# Altium PCB PCB3 - 5x5 - placement V1.PcbDoc
Units mm, origin at the board's own origin, x right, y up, seen from the top; angles counter-clockwise.
Board outline 50 x 50 mm, 2 copper layers (Top Layer, Bottom Layer); 85 components, 65 nets, 284 pads, 41 vias.
Unrouted connection lines stored in the file: 2.
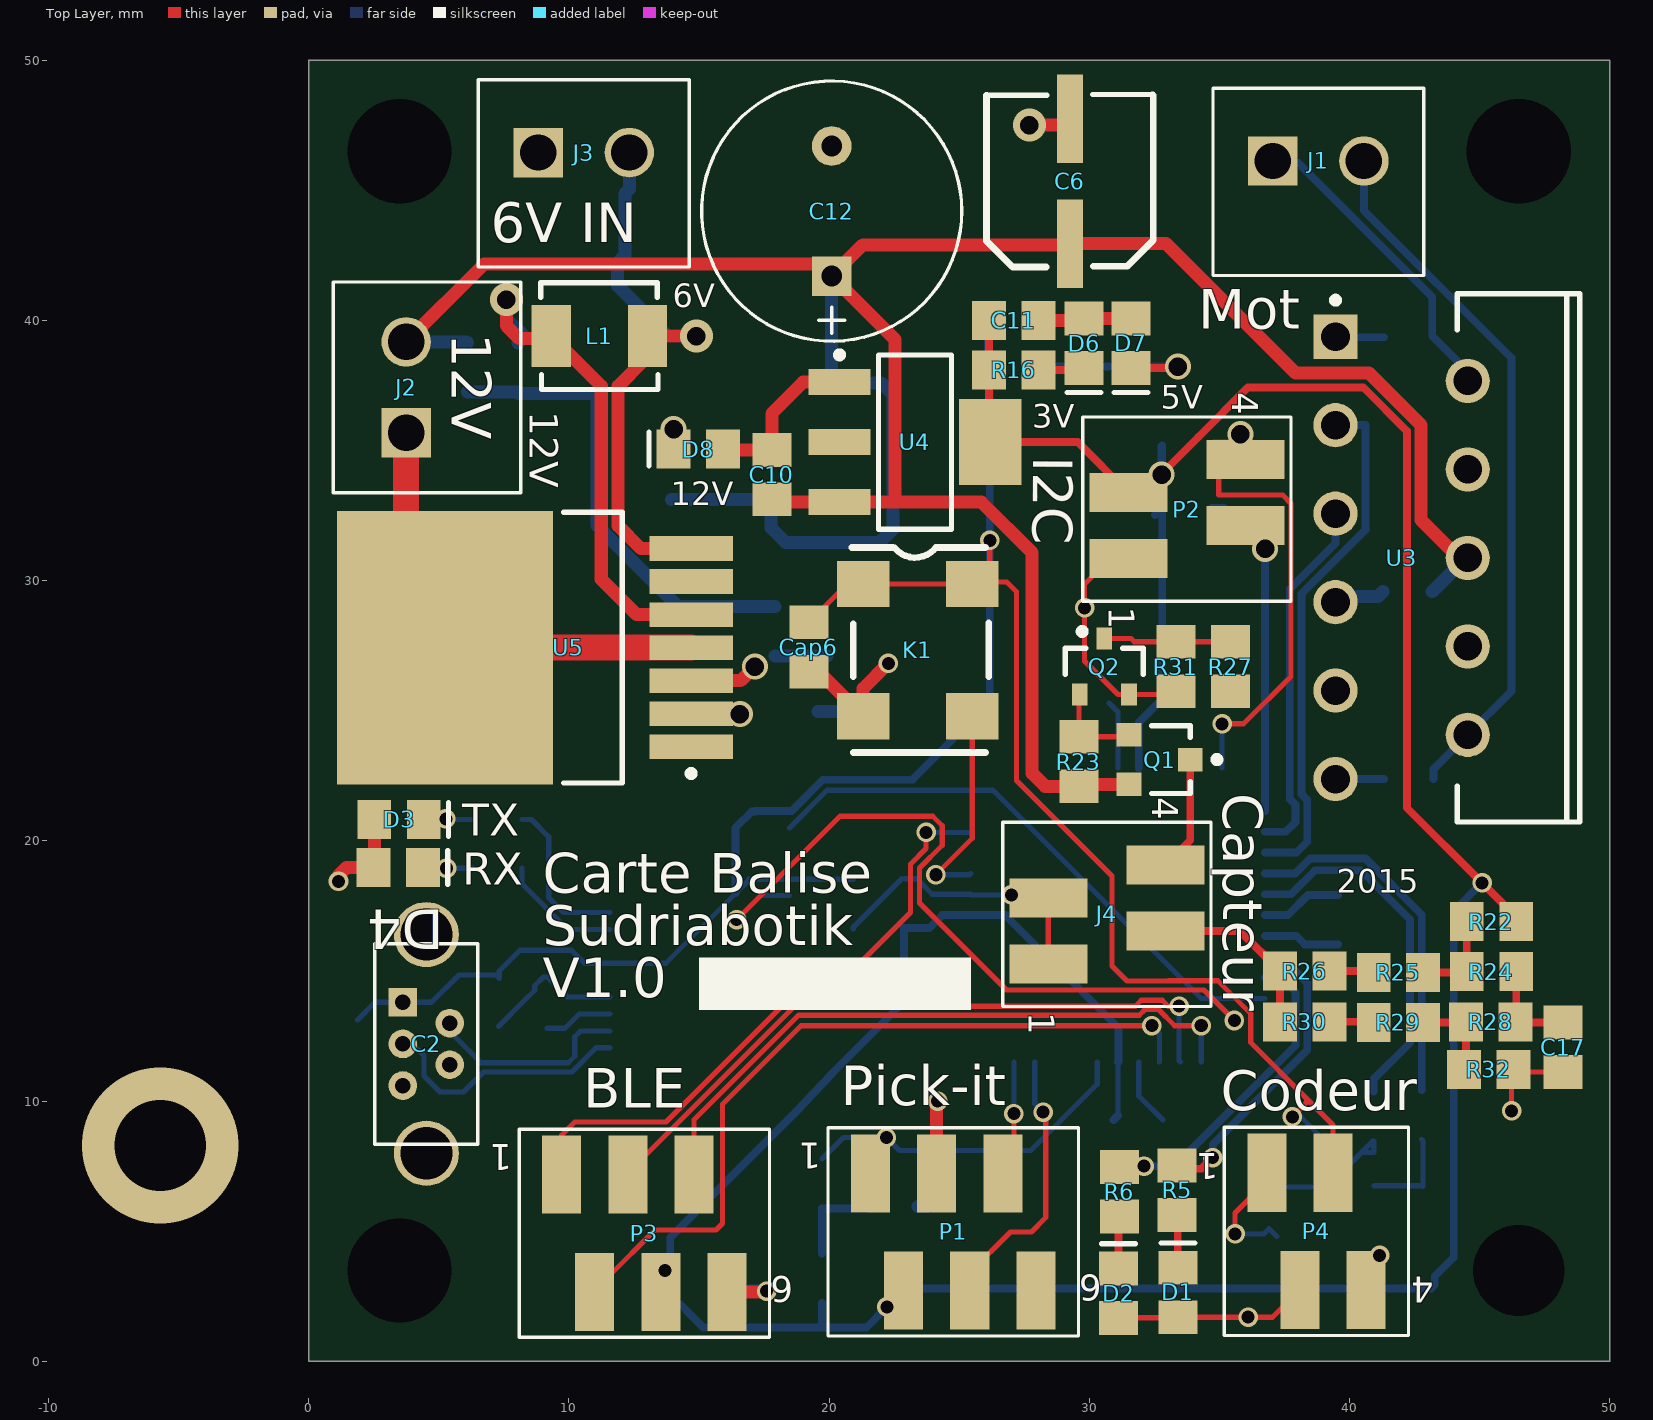
[diagram p0: Top Layer view]
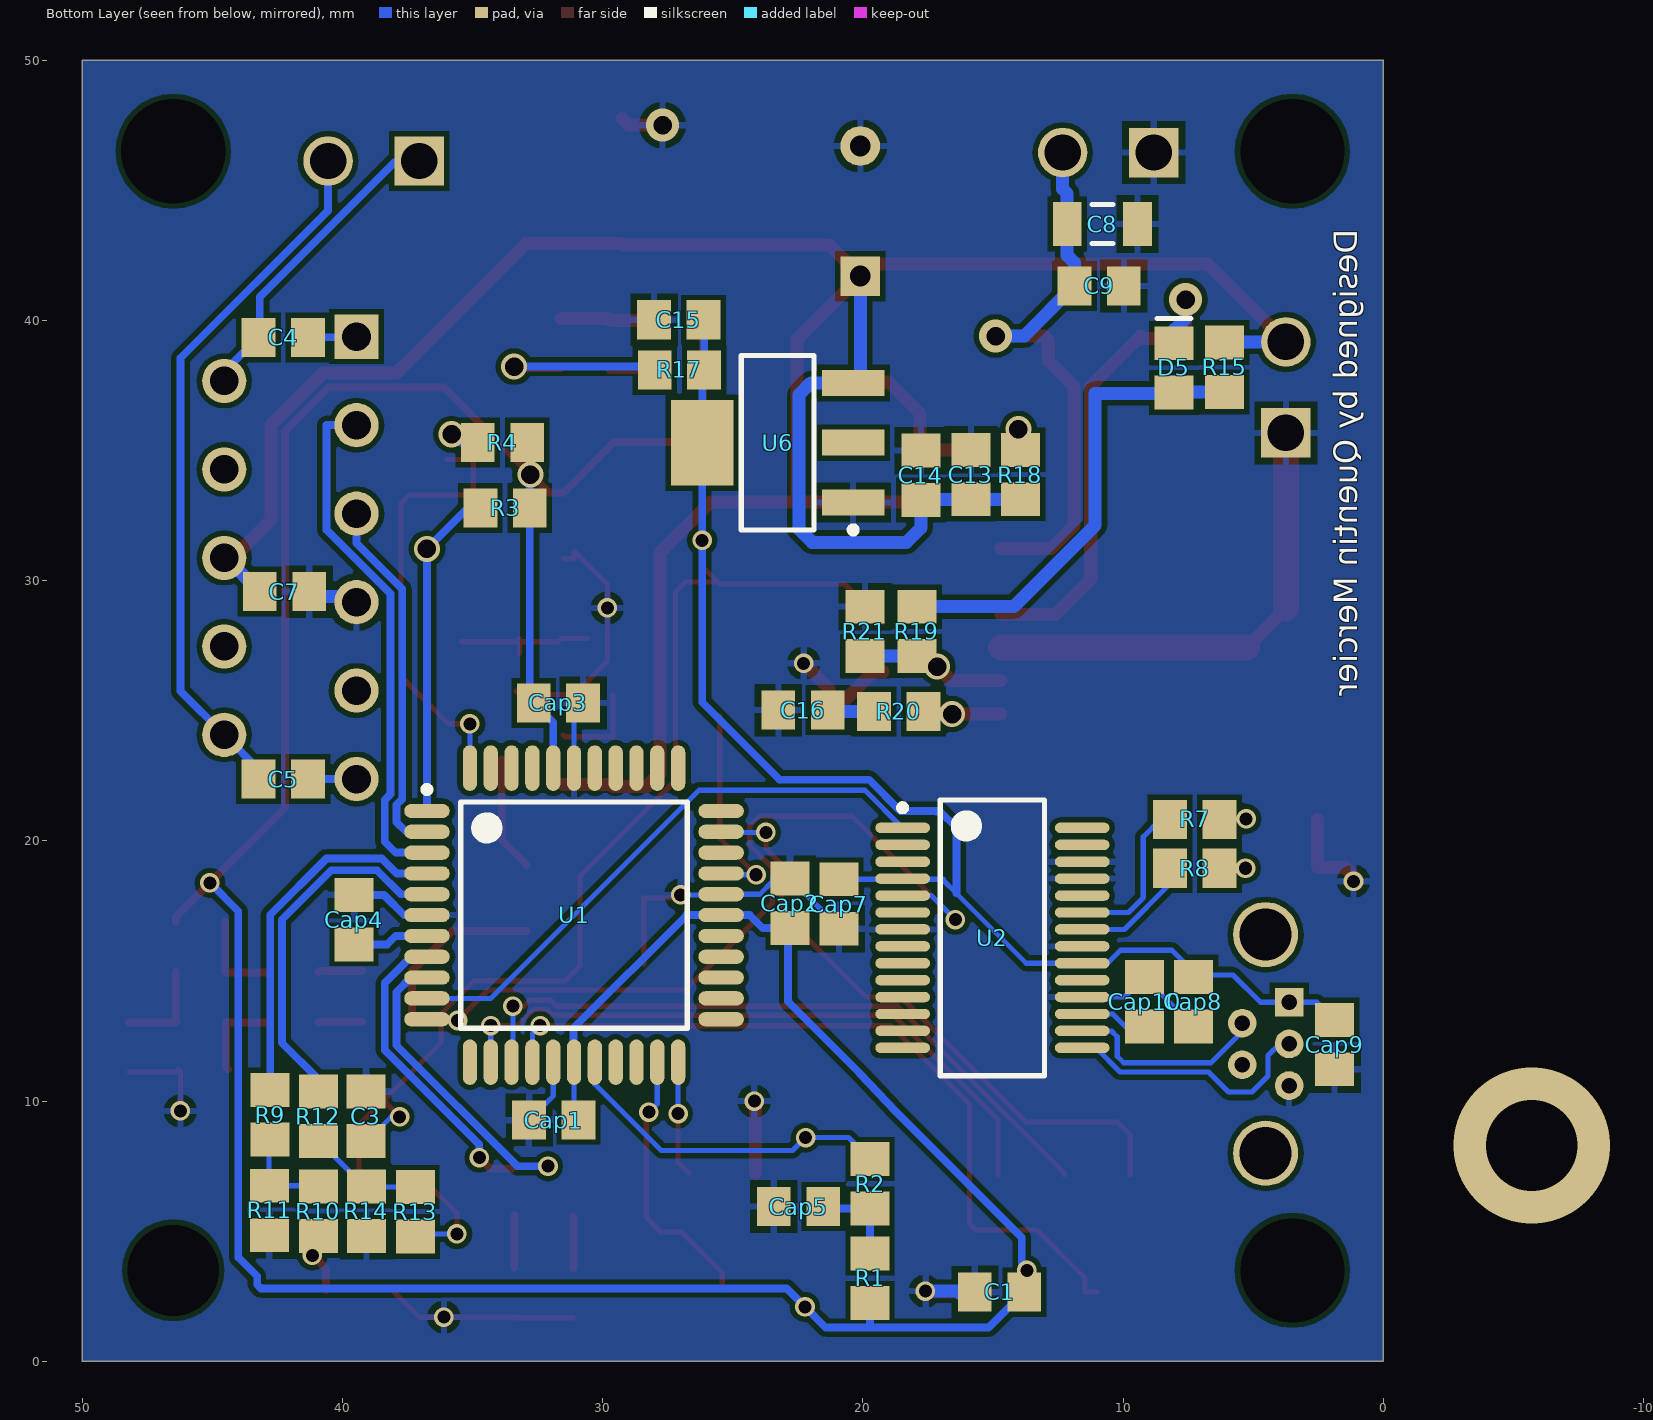
[diagram p1: Bottom Layer view, seen from below]
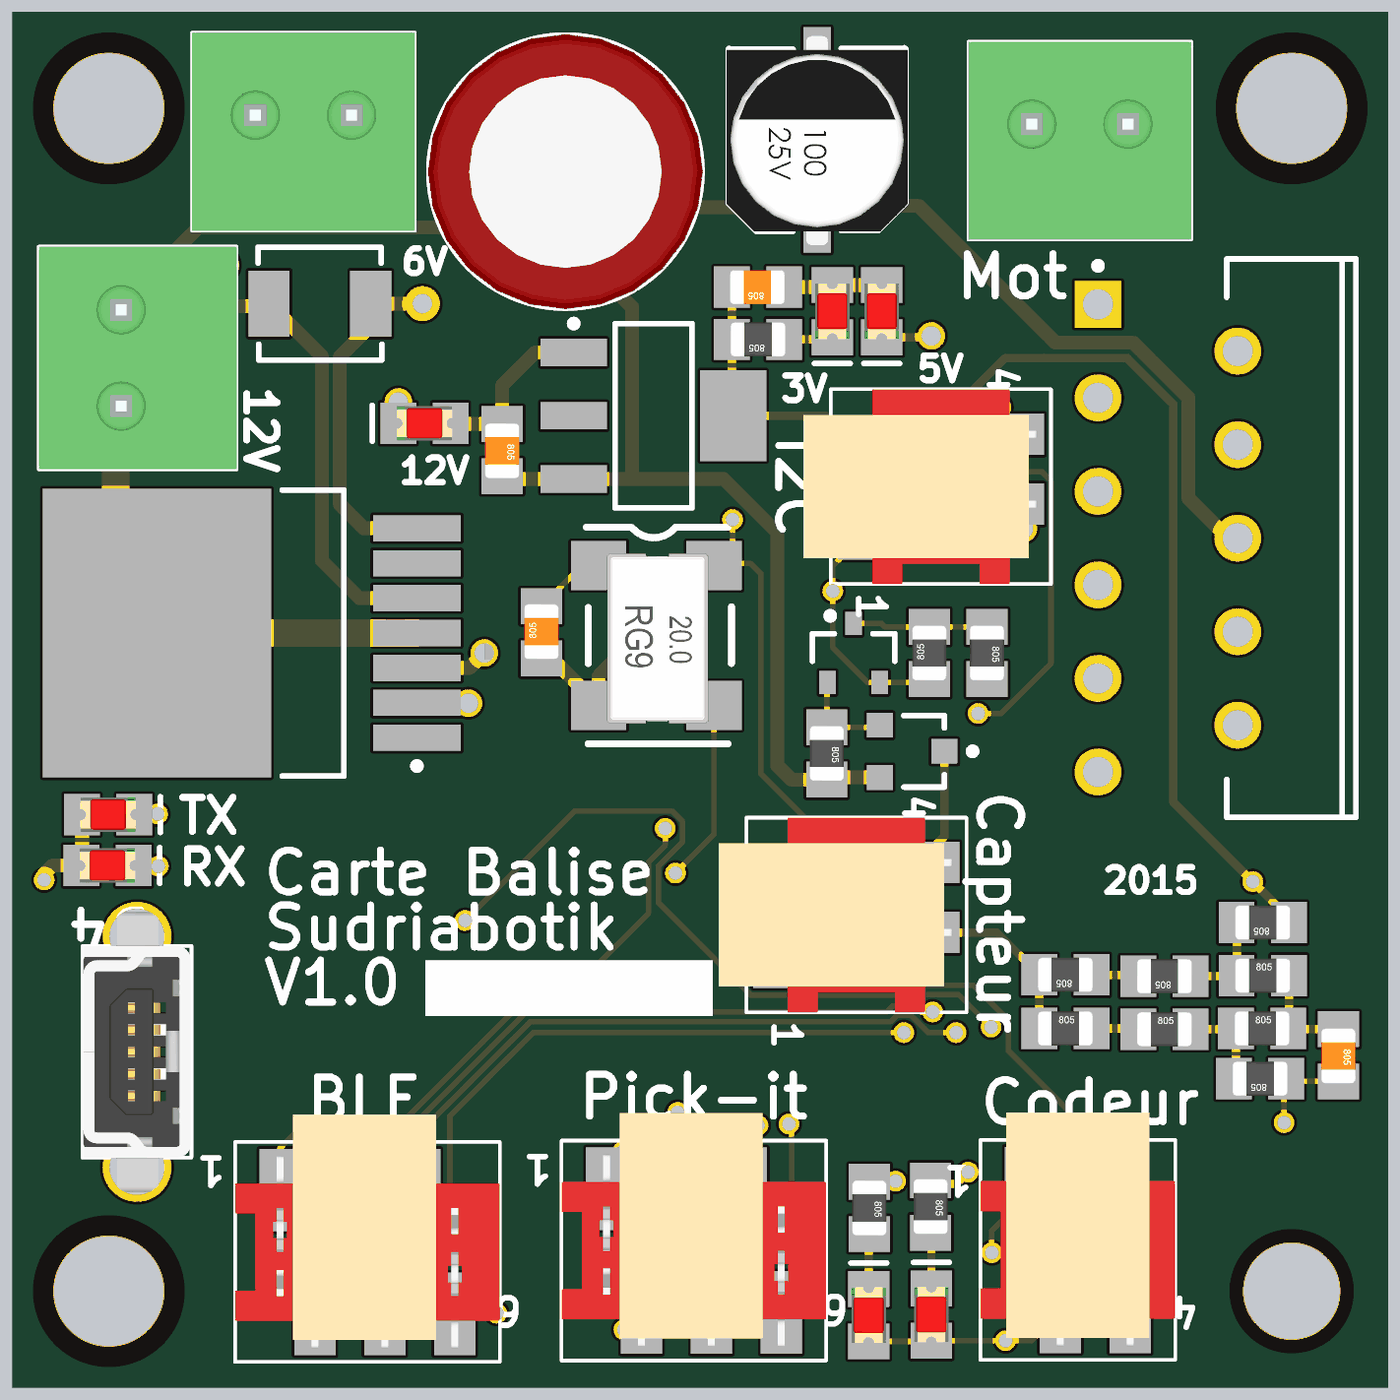
[diagram p2: 3D render of the assembled board from above, using the file's embedded part models]
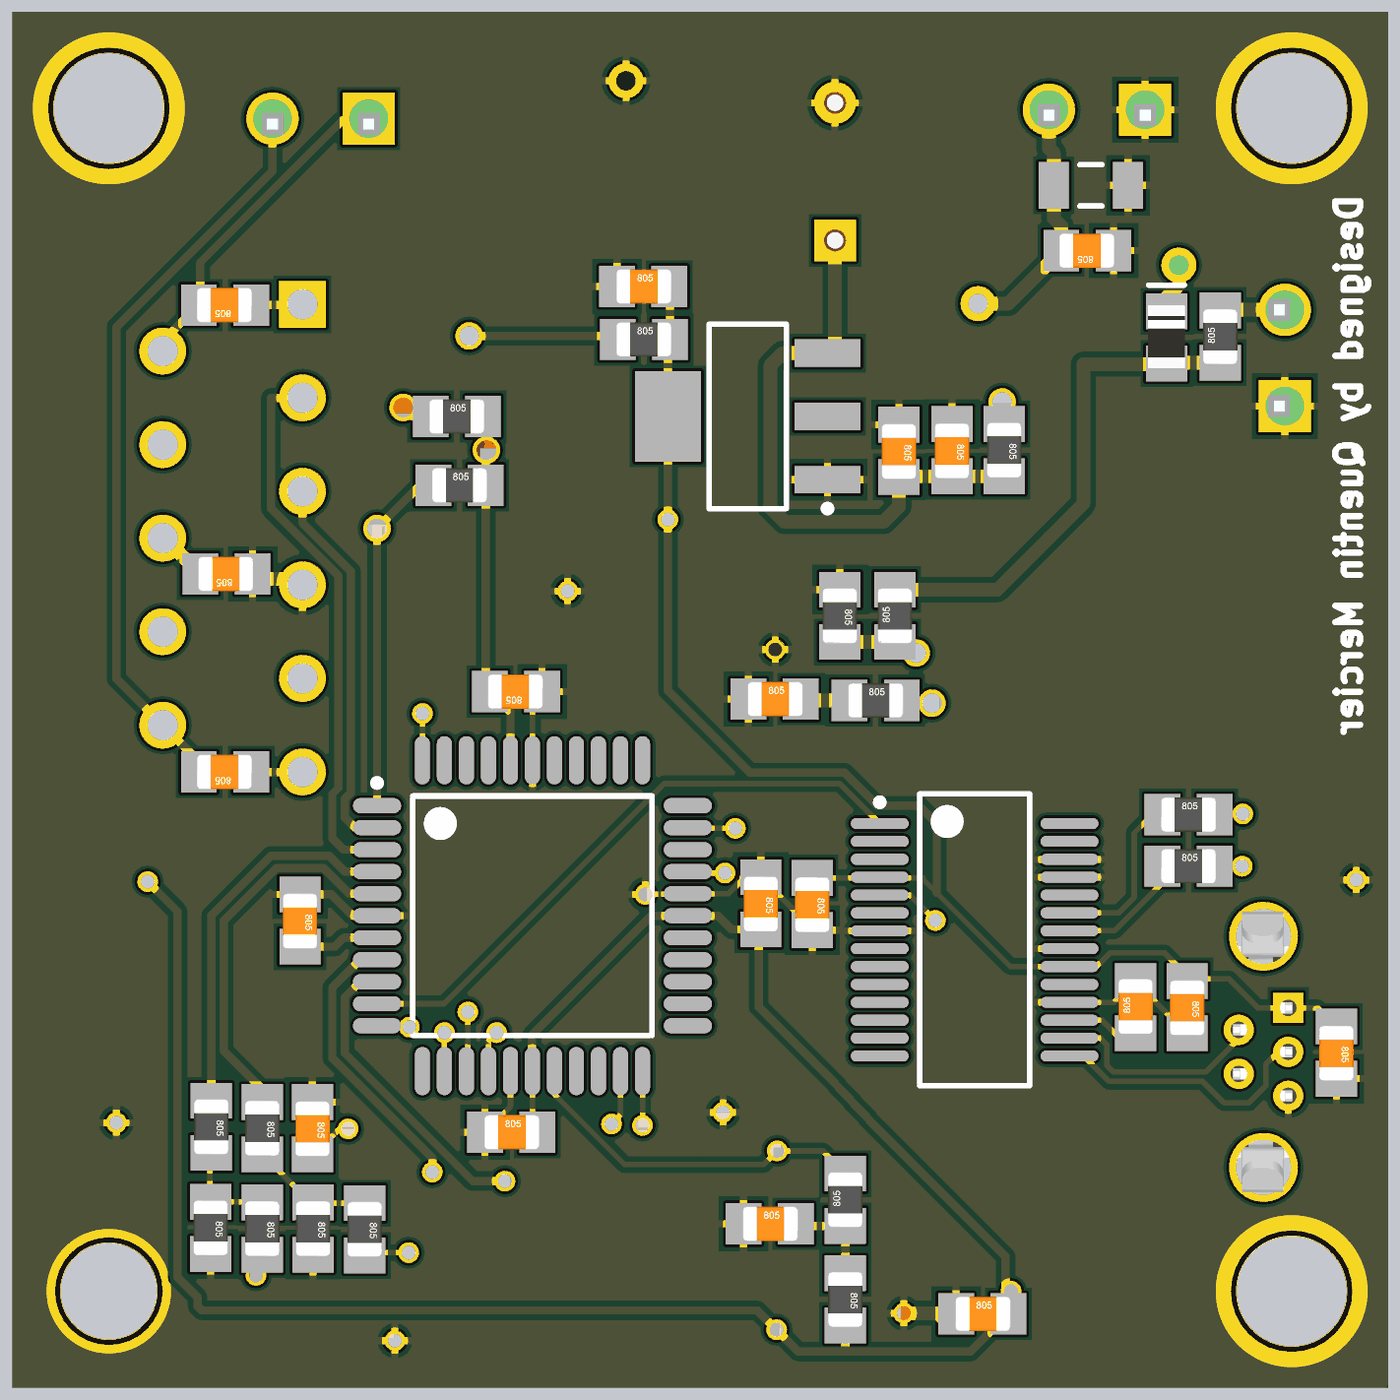
[diagram p3: 3D render of the assembled board from below, using the file's embedded part models]

## Layer stack, top to bottom
Top Solder: solder mask 0.0102, Solder Resist, Dk 3.5
Top Layer: signal copper 0.0356
Dielectric 1: dielectric 0.32, FR-4, Dk 4.8
Bottom Layer: signal copper 0.0356
Bottom Solder: solder mask 0.0102, Solder Resist, Dk 3.5

## Board outline
0,50 50,50 50,0 0,0

## Design rules (kind name [scope] priority, off if disabled: settings)
Clearance Clearance_2 [InNamedPolygon('plan de masse')] p1: gap=0.2
Clearance Clearance_1 [InNamedPolygon('plan de masse')] p2: gap=0.254
Clearance [All] p3: gap=0.15
PolygonConnect [All] p1: connectstyle=Relief reliefconductorwidth=0.254 reliefentries=4 polygonreliefangle="90 Angle" airgapwidth=0.254
RoutingVias [All] p1: holewidth=0.711 width=1.27 viastyle="Through Hole" minholewidth=0.5 minwidth=0.75 maxholewidth=0.711 maxwidth=1.5
SolderMaskExpansion [All] p1: expansion=0.102
UnpouredPolygon [All] p1: allowunpoured=FALSE
Width [All] p1: maxlimit=2 minlimit=0.2 preferedwidth=0.2
29 further rules are at their usual default settings.

## Classes and differential pairs
component class "Sheet 1 - Micro": C1 C2 Cap1 Cap2 Cap3 Cap4 Cap5 Cap6 Cap7 Cap8 Cap9 Cap10 D1 D2 D3 D4 K1 P1 P2 P3 R1 R2 R3 R4 R5 R6 R7 R8 U1 U2
component class "Sheet 2 - Moteurs": C3 C4 C5 C6 C7 J1 P4 R9 R10 R11 R12 R13 R14 U3
component class "Sheet 3 - Alims": C8 C9 C10 C11 C12 C13 C14 C15 C16 D5 D6 D7 D8 J2 J3 L1 R15 R16 R17 R18 R19 R20 R21 U4 U5 U6
component class "Sheet 4 - Capteurs": C17 J4 Q1 Q2 R22 R23 R24 R25 R26 R27 R28 R29 R30 R31 R32

## Components (designator, comment, footprint, x,y, rotation, side; value= is the part's Value field where it differs from the comment)
C1 "100pF" C0805 14.75,2.675 r180 bottom
C2 "WE-Communication Connectors 651005136421" 651005136421 4.525,12.2 r270 top
C3 "0.1uF" C0805 39.1,9.425 r270 bottom
C4 "10nF" C0805 42.275,39.35 r0 bottom
C5 "10nF" C0805 42.275,22.375 r0 bottom
C6 "220uF" "Capa CMS D6.3_E1.8" 29.25,45.35 r270 top
C7 "1uF" C0805 42.225,29.575 r0 bottom
C8 "100uF" C1206 10.8,43.7 r180 bottom
C9 "0.1uF" C0805 10.925,41.325 r0 bottom
C10 "1uF" C0805 17.8,34.075 r270 top
C11 "10uF" C0805 27.1,40 r180 top
C12 "1200uF" CAPA_D10_E5 20.1,44.2 r90 top
C13 "0.1uF" C0805 15.85,34.075 r270 bottom
C14 "1UF" C0805 17.775,34.05 r270 bottom
C15 "10uF" C0805 27.075,40.025 r180 bottom
C16 "0.2uF" C0805 22.3,25.025 r180 bottom
C17 "100pF" C0805 48.2,12.075 r270 top
Cap1 "0.1uF" C0805 31.875,9.275 r180 bottom
Cap2 "0.1uF" C0805 22.8,17.6 r270 bottom
Cap3 "0.1uF" C0805 31.7,25.3 r0 bottom
Cap4 "0.1uF" C0805 39.55,16.975 r270 bottom
Cap5 "0.1uF" C0805 22.475,5.95 r180 bottom
Cap6 "0.1uF" C0805 19.225,27.45 r90 top
Cap7 "0.1uF" C0805 20.925,17.575 r270 bottom
Cap8 "0.1uF" C0805 7.3,13.825 r270 bottom
Cap9 "4.7uF" C0805 1.875,12.175 r270 bottom
Cap10 "0.1uF" C0805 9.175,13.825 r90 bottom
D1 "LED" "LED 0805" 33.4,2.65 r270 top
D2 "LED" "LED 0805" 31.125,2.625 r270 top
D3 "LED" "LED 0805" 3.475,20.825 r180 top
D4 "LED" "LED 0805" 3.45,18.975 r180 top
D5 "D Schottky" D0805 8.05,38.175 r270 bottom
D6 "LED" "LED 0805" 29.8,39.125 r90 top
D7 "LED" "LED 0805" 31.6,39.125 r90 top
D8 "LED" "LED 0805" 14.975,35.05 r0 top
J1 "WE Type 691321100002" 691321100002 38.8,46.125 r0 top
J2 "WE Type 691321100002" 691321100002 3.75,37.425 r90 top
J3 "WE Type 691321100002" 691321100002 10.575,46.45 r0 top
J4 "WE 4 pins" 690367280476 30.675,17.175 r270 top
K1 "Quartz 10Mhz" IQXO-70 25.5,29.875 r270 top
L1 "15uH" "Inductance 4.06 x 4.45" 11.175,39.4 r180 top
P1 "mini connect" 690367280676 24.771,4.975 r180 top
P2 "mini connect" 690367280476 33.75,32.748 r270 top
P3 "Mini connect" 690367280676 12.9,4.925 r180 top
P4 "WE 4 pins" 690367280476 38.725,5 r180 top
Q1 "MOSFET P" SOT-23 32.7,23.125 r270 top
Q2 "Transistor NPN" SOT23_L 30.575,26.7 r90 top
R1 "10K" 0805 19.725,3.2 r270 bottom
R2 "100R" 0805 19.725,6.825 r90 bottom
R3 "1K" 0805 33.75,32.8 r180 bottom
R4 "1K" 0805 33.85,35.3 r180 bottom
R5 "330R" 0805 33.375,6.575 r270 top
R6 "330R" 0805 31.15,6.525 r270 top
R7 "470R" 0805 7.25,20.825 r180 bottom
R8 "470R" 0805 7.25,18.95 r180 bottom
R9 "470R" 0805 42.775,9.475 r270 bottom
R10 "10K" 0805 40.925,5.775 r270 bottom
R11 "15K" 0805 42.8,5.8 r270 bottom
R12 "1K" 0805 40.925,9.425 r270 bottom
R13 "1K" 0805 37.2,5.75 r270 bottom
R14 "1K" 0805 39.075,5.775 r270 bottom
R15 "0R" 0805 6.1,38.2 r90 bottom
R16 "330R" 0805 27.1,38.1 r180 top
R17 "470R" 0805 27.05,38.1 r180 bottom
R18 "1K" 0805 13.95,34.075 r270 bottom
R19 "17K4" 0805 17.925,28.05 r90 bottom
R20 "1K" 0805 18.625,24.975 r180 bottom
R21 "2K" 0805 19.925,28.05 r270 bottom
R22 "215K" 0805 45.45,16.9 r180 top
R23 "10K" 0805 29.6,23.05 r270 top
R24 "0R" 0805 45.45,14.975 r0 top
R25 "1K" 0805 41.875,14.95 r180 top
R26 "0R" 0805 38.275,15 r180 top
R27 "1K" 0805 35.425,26.7 r270 top
R28 "0R" 0805 45.425,13.05 r0 top
R29 "10K" 0805 41.875,13.025 r0 top
R30 "0R" 0805 38.275,13.05 r0 top
R31 "10K" 0805 33.325,26.7 r90 top
R32 "3K4" 0805 45.35,11.225 r180 top
U1 "DSPIC33FJ128MC804T-I/PT" TQFP-PT44_N 31.1,17.15 r180 bottom
U2 "IC_FT232RL" SSOP-28 15.025,16.275 r180 bottom
U3 "LMD18200T" TA11B 42,30.875 r270 top
U4 "LM1117MP-3.3" MP04A_N 23.3,35.325 r0 top
U5 "LM2588S-ADJ" TS7B_N 8.7,27.425 r180 top
U6 "LM1117IMP-5.0" MP04A_N 23.275,35.3 r0 bottom

## Footprints (in the part's own frame and the unit in brackets; to place one, negate y for a bottom-side part, rotate by r counter-clockwise, add the part's x,y. Pads: shape width x height; smd on the part's side, far side on the other; paste and mask are expansions set on the pad)
0805 [mm] "Chip Resistor; Body 2.0 x 1.3 mm (LxW typ)"
  rect 1.3x1.5 smd: 1(-0.95,0) 2(0.95,0)
  body extent -1,-0.62 1,0.63, height 0.78
651005136421 [mm] "5 pins"
  rect 1.1x1.1 hole 0.6: 1(-1.6,-0.9)
  round 1.1 hole 0.6: 2(-0.8,0.9) 3(0,-0.9) 4(0.8,0.9) 5(1.6,-0.9)
  round 2.5 hole 2: Z1(4.2,0) Z2(-4.2,0)
  silkscreen extent -3.85,-1.98 3.85,1.98, body extent -5.1,-1.95 5.1,1.95, height 9.21
690367280476 [mm] "without Latch, 4 pins, SMT, straight"
  rect 1.5x3 smd: 1(1.905,-2.25) 2(0.635,2.25) 3(-0.635,-2.25) 4(-1.905,2.25)
  silkscreen extent -3.54,-4 3.54,4, body extent -3.54,-5 3.54,3.5, height 5.7
690367280676 [mm] "without Latch, 6 pins, SMT, straight"
  rect 1.5x3 smd: 1(3.175,-2.25) 2(1.905,2.25) 3(0.635,-2.25) 4(-0.635,2.25) 5(-1.905,-2.25) 6(-3.175,2.25)
  silkscreen extent -4.81,-4 4.81,4, body extent -4.81,-5 4.81,3.5, height 5.75
691321100002 [mm] "3,50mm - PCB Vertical - 02p"
  rect 1.9x1.9 hole 1.4: 1(-1.75,0)
  round 1.9 hole 1.4: 2(1.75,0)
  silkscreen extent -4.05,-4.4 4.05,2.8, body extent -4.05,-4.4 4.05,2.8, height 9.21
C0805 [mm] "Chip Resistor; Body 2.0 x 1.3 mm (LxW typ)"
  rect 1.3x1.5 smd: 1(-0.95,0) 2(0.95,0)
  body extent -0.97,-0.62 1.03,0.63, height 0.78
C1206 [mm] "Chip Capacitor, Body 3.2x1.6mm, IPC High Density"
  rect 1.1x1.7 smd: 1(-1.35,0) 2(1.35,0)
  silkscreen extent -0.4,-0.75 0.4,0.75, body extent -1.7,-0.9 1.7,0.9, height 1.3
"Capa CMS D6.3_E1.8" [mm]
  rect 3.4x1 smd: 1(2.4,0) 2(-2.4,0)
  silkscreen extent -3.33,-3.2 3.3,3.2, body extent -3.77,-3.3 3.83,3.3, height 8
CAPA_D10_E5 [mm]
  rect 1.524x1.524 hole 0.8: 1(-2.5,0)
  round 1.524 hole 0.8: 2(2.5,0)
  silkscreen extent -5,-5 5,5, body extent -5,-5 5,5, height 12
D0805 [mm] "Chip Capacitor; Body 2.0 x 1.2 mm (LxW typ)"
  rect 1.3x1.5 smd: 1(-0.95,0) 2(0.95,0)
  silkscreen extent -1.9,-0.65 -1.9,0.65, body extent -1.17,-0.67 1.13,0.68, height 0.76
"Inductance 4.06 x 4.45" [mm]
  rect 1.5x2.4 smd: 1(-1.85,0) 2(1.85,0)
  silkscreen extent -2.25,-2.05 2.25,2.05
IQXO-70 [mil]
  rect 70x79 smd: 1(0,-165) 2(200,-165) 3(200,0) 4(0,0)
  silkscreen extent -55,-182 255,25, body extent -18,-154 226,-8, height 48
"LED 0805" [mm] "Chip Capacitor; Body 2.0 x 1.2 mm (LxW typ)"
  rect 1.3x1.5 smd: 1(-0.95,0) 2(0.95,0)
  silkscreen extent -1.9,-0.65 -1.9,0.65, body extent -1.01,-0.62 1.01,0.63, height 1.1
MP04A_N [mm] "SOT223, 4-Leads, Body 6.5x3.5mm, Pitch 2.3mm, Lead Span 7mm, IPC Medium Density"
  rect 2.4x1 smd: 1(-2.9,2.3) 2(-2.9,0) 3(-2.9,-2.3)
  rect 2.4x3.3 smd: 4(2.9,0)
  silkscreen extent -3.02,-3.35 1.4,3.47, body extent -1.85,-3.35 1.85,3.35, height 1.8
SOT23_L [mm] "SOT23, 3-Leads, Body 2.9x1.3mm, Pitch 0.95mm, Lead Span 2.3mm - Reverse Pinning, IPC High Density"
  rect 0.85x0.6 smd: 1(1.075,0) 2(-1.075,-0.95) 3(-1.075,0.95)
  silkscreen extent -0.3,-1.5 1.47,1.5, body extent -0.7,-1.5 0.7,1.5, height 1.1
SOT-23 [mm] "SOT-23; 3 Leads; Body 3.0 x 2.5 mm, inc. leads (LxW max), Alternate Lead Configuration"
  rect 0.9x0.95 smd: 1(0,1.175) 2(-0.95,-1.175) 3(0.95,-1.175)
  silkscreen extent -1.3,-0.3 1.3,2.33
SSOP-28 [mm] "28-Pin SSOP 0.65 mm Pitch"
  oval 2.1x0.4 smd: 1(-3.45,4.225) 2(-3.45,3.575) 3(-3.45,2.925) 4(-3.45,2.275) 5(-3.45,1.625) 6(-3.45,0.975) 7(-3.45,0.325) 8(-3.45,-0.325) 9(-3.45,-0.975) 10(-3.45,-1.625) 11(-3.45,-2.275) 12(-3.45,-2.925) 13(-3.45,-3.575) 14(-3.45,-4.225) 15(3.45,-4.225) 16(3.45,-3.575) 17(3.45,-2.925) 18(3.45,-2.275) 19(3.45,-1.625) 20(3.45,-0.975) 21(3.45,-0.325) 22(3.45,0.325) 23(3.45,0.975) 24(3.45,1.625) 25(3.45,2.275) 26(3.45,2.925) 27(3.45,3.575) 28(3.45,4.225)
  silkscreen extent -3.57,-5.3 2,5.3, body extent -2.7,-5.3 2.7,5.3, height 2
TA11B [mm] "TO, Thru-Hole, Vertical, Heatsink Mounted; 11 Bent Staggered Leads; Pitch 1.7 mm"
  rect 1.7x1.7 hole 1.1: 1(-8.5,-2.54)
  round 1.7 hole 1.1: 2(-6.8,2.54) 3(-5.1,-2.54) 4(-3.4,2.54) 5(-1.7,-2.54) 6(0,2.54) 7(1.7,-2.54) 8(3.4,2.54) 9(5.1,-2.54) 10(6.8,2.54) 11(8.5,-2.54)
  silkscreen extent -10.15,-2.66 10.15,6.84, body extent -10.15,2.14 10.15,6.84, height 21
TQFP-PT44_N [mm] "Thin QFP, 44-Leads, Body 10x10mm, Pitch 0.8mm, IPC Medium Density"
  oval 1.75x0.55 smd: 1(-5.65,4) 2(-5.65,3.2) 3(-5.65,2.4) 4(-5.65,1.6) 5(-5.65,0.8) 6(-5.65,0) 7(-5.65,-0.8) 8(-5.65,-1.6) 9(-5.65,-2.4) 10(-5.65,-3.2) 11(-5.65,-4) 23(5.65,-4) 24(5.65,-3.2) 25(5.65,-2.4) 26(5.65,-1.6) 27(5.65,-0.8) 28(5.65,0) 29(5.65,0.8) 30(5.65,1.6) 31(5.65,2.4) 32(5.65,3.2) 33(5.65,4)
  oval 0.55x1.75 smd: 12(-4,-5.65) 13(-3.2,-5.65) 14(-2.4,-5.65) 15(-1.6,-5.65) 16(-0.8,-5.65) 17(0,-5.65) 18(0.8,-5.65) 19(1.6,-5.65) 20(2.4,-5.65) 21(3.2,-5.65) 22(4,-5.65) 34(4,5.65) 35(3.2,5.65) 36(2.4,5.65) 37(1.6,5.65) 38(0.8,5.65) 39(0,5.65) 40(-0.8,5.65) 41(-1.6,5.65) 42(-2.4,5.65) 43(-3.2,5.65) 44(-4,5.65)
  silkscreen extent -5.77,-4.35 4.35,4.95, body extent -5,-5 5,5, height 1.2
TS7B_N [mm] "D2-PAK, 8-Leads, Body 8.6x10.2mm, Pitch 1.27mm, Lead Span 14.1mm, IPC Medium Density"
  rect 3.2x0.95 smd: 1(-6,3.81) 2(-6,2.54) 3(-6,1.27) 4(-6,0) 5(-6,-1.27) 6(-6,-2.54) 7(-6,-3.81)
  rect 8.3x10.5 smd: 8(3.45,0)
  silkscreen extent -6.13,-5.2 -1.1,5.2, body extent -3.35,-5.2 6.05,5.2, height 4.64

## Part data
C1 C3 C4 C5 C7 C9 C10 C11 C13 C14 C15 C16 C17 Cap1 Cap2 Cap3 Cap4 Cap5 Cap6 Cap7 Cap8 Cap9: library part Cap, "Capacitor 0805"
C2: "WR-COM Mini USB Vertical TH Type B 5 Contacts"
C6: library part Cap2, "EEEFK1C221XP"
C8: library part Cap2, "Capacitor 1206"
C12: library part Cap2, "EEUFM1C122L"
Cap10: library part Cap, "Capacitor"
D1 D2 D3 D4 D6 D7 D8: library part LED2, "Typical RED, GREEN, YELLOW, AMBER GaAs LED 0805"
D5: "Schottky Diode 0805"
J1 J2 J3: library part "WE-Terminal Blocks Plugable Type 691321100002", "WR-TBL Terminal block - serie 3211 - 3.50 mm"
J4: library part "MICRO-MATCH FOB.04P", "connecteur WE"
K1: library part OSCILLATEUR, "Oscillateur quartz"
L1: library part Inductor, "SRP4020TA-150M"
P1 P3: library part MHDR1X6, "Header, 6-Pin"
P2 P4: library part MHDR1X4, "Header, 4-Pin"
Q1: library part PMOS-2, "P-Channel Power MOSFET"
Q2: library part QNPN, "NPN Bipolar Transistor"
R1 R2 R3 R4 R5 R6 R7 R8 R9 R10 R11 R12 R13 R14 R15 R16 R17 R18 R19 R20 R21 R22 R23 R24 R25 R26 R27 R28 R29 R30 R31 R32: library part Res3, "Resistor 0805"
U1: "High-Performance 16-bit Digital Signal Controller, 128 KB Flash, 16 KB RAM, 44-Pin TQFP, Industrial Temperature, Tape and Reel"
U2: "FT232R USB UART"
U3: "3A, 55V H-Bridge"
U4 U6: "800mA Low-Dropout Linear Regulator"
U5: "SIMPLE SWITCHER 5A Flyback Regulator with Shutdown"

## Free pads (board coordinates)
  round 1.524 hole 4 paste+1 mask+2: 11(3.5,3.5)
  round 1.524 hole 3.5 paste+1 mask+1.5: 11(46.5,3.5)
  round 1.524 hole 4 paste+2 mask+2: 12(3.5,46.5) 12(46.5,46.5)

## Via types
v1: diameter 0.75, hole 0.5, Top Layer to Bottom Layer, 30 vias
v2: diameter 1, hole 0.711, Top Layer to Bottom Layer, 7 vias
v3: diameter 1.27, hole 0.711, Top Layer to Bottom Layer, 3 vias
v4: diameter 6, hole 3.5, Top Layer to Bottom Layer, 1 vias

## Nets (pads, with @x,y where several pads share a name; then routed paths per layer and width w, separated by ;. In a path a pad name is that pad's centre, name@x,y a point inside that pad or via, vN(x,y) a via of type N, cw(c..) or ccw(c..) an arc to the next point about the centre after c; other vN are vias at no path point)
3.3V: C1.2 C11.2 Cap1.2 Cap2.2 Cap3.2 P1.2 P2.3 P3.4 R1.2 R3.2 R4.2 R16.2 R22.1 U1.17 U1.28 U1.40 U4.4 | length 139.1
  Top Layer w0.3: C11.2 R16.2 26.15,35.375 U4.4 29.558,35.325 P2.3 32.058,33.383 34.2,35.525 34.2,35.527 36.098,37.425 40.522,37.425 42.2,35.747 42.2,21.275 v1(45.088,18.388) 46.4,17.075 R22.1
  Bottom Layer w0.2: Cap1.2@31.1,9.45 U1.17
  Bottom Layer w0.3: v1(13.7,3.5) 13.8,3.4 C1.2 ; R1.2 19.725,1.325 19.7,1.3 ; Cap1.2 Cap1.2@31.1,9.45 ; U1.17 31.125,11.525 31.125,12.8 26.775,17.15 U1.28 24.35,17.15 23.85,16.65 22.875,16.65 22.875,13.825 20.106,11.056 18.725,9.587 13.9,4.762 13.9,2.675 C1.2 ; U1.40 31.9,24.55 Cap3.2 32.8,25.45 R3.2 ; R3.2@32.525,32.525 R3.2 ; v2(32.775,34.075) 32.775,35.175 32.8,35.2 R3.2 ; v1(45.088,18.388) 44,17.3 44,3.999 43.275,3.274 43.275,2.95 43.125,2.8 22.925,2.8 v1(22.225,2.1) 21.425,1.3 19.7,1.3 ; C1.2 15.175,1.3 19.7,1.3
5V: C2.1 C3.2 C15.2 Cap6.2 Cap7.1 Cap8.1 Cap9.1 K1.1 K1.4 P4.3 R17.2 U2.4 U2.20 U6.4 | length 93.7
  Top Layer w0.2: Cap6.2 20.7,29.875 K1.1 K1.4 K1.4@25.575,29.95 ; v1(26.175,31.55) 26.175,30.55 K1.4@25.575,29.95 ; v1(37.8,9.4) 38.35,9.95 38.35,10.1 ; P4.3 P4.3@39.36,7.84 ; P4.3@39.36,7.915 39.36,9.09 38.35,10.1 ; K1.4@25.575,29.95 26.825,29.95 27.2,29.575 27.2,22.325 30.875,18.65 30.875,15.195 31.45,14.62 33.041,14.62 33.046,14.625 34.934,14.625 36.2,13.359 36.2,12.25 38.35,10.1
  Bottom Layer w0.2: Cap9.1 2.55,13.8 C2.1 4.725,13.8 5.775,14.85 7.2,14.85 7.325,14.725 7.325,15 8.125,15.8 10.1,15.8 10.6,15.3 U2.20 13.725,15.3 16.413,17.988 16.9,18.475 16.9,18.525 18.45,18.525 U2.4 18.5,18.525 Cap7.1 ; v1(37.8,9.4) 38.125,9.4 C3.2@39.1,8.425
  Bottom Layer w0.3: 16.413,17.988 16.4,18 16.4,20.5 17.025,21.125 17.175,21.125 17.15,21.15 18.559,21.15 19.759,22.35 23.2,22.35 26.175,25.325 v1(26.175,31.55) U6.4 26.175,38.025 R17.2 26.1,40 C15.2
12V: C6.1 C7.2 C10.2 C12.1 C13.2 C14.2 J2.2 Q1.3 R15.2 R18.2 R23.2 U3.6 U4.3 U6.3 | length 108.9
  Top Layer w0.5: J2.2 6.739,42.164 19.636,42.164 C12.1 ; C10.2@17.725,33.2 C10.2 17.9,33.025 U4.3 22.525,33.025 ; Q1.3 29.675,22.175 R23.2 28.3,22.1 27.8,22.6 27.8,31.075 25.85,33.025 22.525,33.025 ; U3.6 44.2,30.875 42.75,32.325 42.75,35.975 40.75,37.975 37.925,37.975 32.95,42.95 C6.1 29.2,42.9 21.3,42.9 C12.1 ; C12.1 22.525,39.275 22.525,33.025
  Bottom Layer w0.5: J2.2 6.075,39.175 R15.2 ; R18.2 C13.2 17.75,33.125 C14.2 17.775,32.025 18.325,31.475 21.95,31.475 22.475,32 22.45,32.025 22.45,37.15 22,37.6 U6.3 20.1,37.875 C12.1 ; C7.2 44.475,30.875 U3.6
"EN CAPTEUR": J4.4 Q1.1 | length 4.4
  Top Layer w0.3: J4.4 33.875,20.03 Q1.1
GND: C1.1 C2.5 C3.1 C6.2 C7.1 C8.2 C9.1 C10.1 C11.1 C12.2 C13.1 C14.1 C15.1 C16.1 C17.2 Cap1.1 Cap2.1 Cap3.1 Cap4.1 Cap5.1 Cap6.1 Cap7.2 Cap8.2 Cap9.2 Cap10.2 D1.2 D2.2 D3.2 D4.2 D6.2 D7.2 D8.2 J2.1 J3.1 J4.1 J4.3 K1.2 P1.3 P2.1 P3.6 P4.2 Q2.2 R11.2 R14.2 R21.1 R31.1 R32.1 U1.6 U1.16 U1.29 U1.39 U2.7 U2.18 U2.21 U2.25 U2.26 U3.7 U4.1 U5.4 U5.8 U6.1 | length 93.8
  Top Layer w0.2: v1(27,17.925) 27.115,17.81 J4.3 J4.1 ; D2.2 33.375,1.675 D1.2 v1(36.1,1.7) ; P2.1 31.1,30.843 31.1,31.141 29.818,29.859 v1(29.818,28.95) 29.818,26.907 31.1,25.625 Q2.2 33.2,25.625 R31.1 ; v1@36.15,1.7 v1(36.1,1.7) ; P4.2 37.04,1.7 v1(36.1,1.7) ; v1(46.225,9.625) 46.225,11.15 R32.1 46.4,11.125 C17.2
  Top Layer w0.5: v1(1.15,18.45) 1.15,18.675 1.45,18.975 D4.2 2.525,19 D3.2 ; U5.8@3.75,28.925 U5.8 ; D8.2 15.95,35.025 C10.1 17.8,36.425 19,37.625 U4.1 ; P3.6 17.575,2.675 v1(17.6,2.7) ; Cap6.1 19.604,26.5 K1.2 21.309,25.859 v1(22.275,26.825) ; P1.3 24.136,9.961 v1(24.175,10) ; v3(27.7,47.5) 29,47.5 C6.2 ; C11.1 29.725,40 D6.2 D7.2
  Top Layer w1: U5.8@3.75,28.925 J2.1 ; U5.8 U5.4
  Bottom Layer w0.2: Cap8.2 8.3,13.875 8.688,14.263 8.688,14.434 9.029,14.775 Cap10.2 9.95,14 U2.18 ; Cap7.2 20.925,16.675 Cap2.1 ; Cap2.1@22.927,18.55 23.475,18.55 23.475,18.441 23.966,17.95 U1.29 25.475,17.925 v1(27,17.925) ; Cap3.1 31.1,24.95 U1.39 ; U1.16 31.9,10.2 Cap1.1
  Bottom Layer w0.3: U1.6 37.625,17.15 38.4,17.925 Cap4.1
  Bottom Layer w0.5: C1.1 15.7,2.95 16.15,2.5 16.35,2.7 v1(17.6,2.7) ; C14.1@17.75,35.025 C14.1 C14.1@17.988,35 ; Cap5.1 Cap5.1@23.825,5.95 ; U3.7 39.86,29.575 40.049,29.386 41.086,29.386 C7.1
NetC2_2: C2.2 U2.16 | length 7.9
  Bottom Layer w0.2: C2.2 5.425,12.675 6.625,11.475 9.975,11.475 10.225,11.725 10.225,12.475 10.45,12.7 U2.16
NetC2_3: C2.3 U2.15 | length 9.9
  Bottom Layer w0.2: C2.3 3.986,12.2 4.433,11.753 4.433,10.967 5.05,10.35 5.95,10.35 6.725,11.125 10.125,11.125 11.05,12.05 U2.15
NetC4_1: C4.1 U3.1 | length 1.9
  Bottom Layer w0.3: U3.1 39.485,39.35 C4.1
NetC4_2: C4.2 J1.1 U3.2 | length 12.2
  Bottom Layer w0.3: J1.1 37,46.075 38,46.075 43.175,40.9 43.175,39.4 C4.2 44.54,38.035 U3.2
NetC5_1: C5.1 U3.11 | length 1.9
  Bottom Layer w0.3: U3.11 C5.1
NetC5_2: C5.2 J1.2 U3.10 | length 27.3
  Bottom Layer w0.3: J1.2 40.55,44.225 46.225,38.55 46.225,25.76 U3.10 43.225,22.76 C5.2
NetC8_1: C8.1 C9.2 J3.2 L1.1 U5.7 | length 21.9
  Top Layer w0.5: U5.7 12.765,31.235 11.896,32.104 11.896,37.471 12.871,38.446 12.871,39.246 L1.1 v3(14.9,39.4)
  Bottom Layer w0.5: J3.2 12.325,45.05 12.15,44.875 C8.1 12.15,42.5 11.875,42.225 C9.2 13.8,39.4 v3(14.9,39.4)
NetC16_2: C16.2 R20.1 | length 1.8
  Bottom Layer w0.5: R20.1 21.3,24.975 C16.2
NetC17_1: C17.1 R24.2 R28.2 | length 3.8
  Top Layer w0.3: R24.2 46.4,13.075 R28.2 46.4,13.025 C17.1
NetCap5_2: Cap5.2 R1.1 R2.1 | length 3.6
  Bottom Layer w0.3: R1.1 R2.1 21.45,5.875 Cap5.2
NetCap10_1: Cap10.1 U2.17 | length 2.6
  Bottom Layer w0.2: Cap10.1@9.175,12.8 9.85,12.8 10.4,13.35 U2.17
NetD1_1: D1.1 R5.2 | length 2
  Top Layer w0.3: R5.2 33.4,5.6 D1.1
NetD2_1: D2.1 R6.2 | length 2
  Top Layer w0.3: D2.1 31.125,5.55 R6.2
NetD3_1: D3.1 R7.2 | length 1
  Bottom Layer w0.2: v1(5.275,20.85) 5.3,20.825 R7.2
NetD4_1: D4.1 R8.2 | length 1
  Bottom Layer w0.2: v1(5.3,18.95) R8.2
NetD5_1: D5.1 L1.2 U5.5 | length 19.2
  Top Layer w0.5: v3(7.6,40.8) 7.6,39.8 8.1,39.3 9.225,39.3 L1.2 11.246,37.479 11.246,30.054 12.605,28.695 U5.5
  Bottom Layer w0.5: v3(7.6,40.8) 7.6,40.075 8.3,39.375 D5.1
NetD5_2: D5.2 R15.1 R19.2 | length 18.2
  Bottom Layer w0.5: R15.1 8.025,37.25 D5.2 8.075,37.2 11.075,37.2 11.075,32.125 14.2,29 R19.2
NetD6_1: D6.1 R16.1 | length 1.8
  Top Layer w0.3: R16.1 29.725,38.1 D6.1
NetD7_1: D7.1 R17.1 | length 7.3
  Top Layer w0.3: D7.1 33.35,38.175 v2(33.4,38.225)
  Bottom Layer w0.3: R17.1 28.125,38.225 v2(33.4,38.225)
NetD8_1: D8.1 R18.1 | length 0.8
  Bottom Layer w0.2: R18.1 13.95,35.75 v2(14.025,35.825)
NetJ4_2: J4.2 R26.2 R30.1 | length 7
  Top Layer w0.3: J4.2 35.785,16.54 R26.2 R30.1
NetK1_3: K1.3 U1.30 | length 8
  Top Layer w0.2: v1(24.1,18.7) 25.5,20.1 K1.3
  Bottom Layer w0.2: v1(24.1,18.7) 25.4,18.7 U1.30
NetP1_1: P1.1 R2.2 U1.18 | length 13
  Bottom Layer w0.2: R2.2 20.55,8.6 v1(22.2,8.6) 22.7,8.1 27.75,8.1 30.3,10.65 U1.18
NetP1_4: P1.4 U1.21 | length 10.6
  Top Layer w0.2: P1.4 25.406,3.406 26.975,4.975 27.775,4.975 28.325,5.525 28.325,9.475 v1(28.225,9.575)
  Bottom Layer w0.2: U1.21 27.9,9.9 v1(28.225,9.575)
NetP1_5: P1.5 U1.22 | length 4.5
  Top Layer w0.2: P1.5 27.1,7.65 v1(27.1,9.525)
  Bottom Layer w0.2: v1(27.1,9.525) U1.22
NetP2_2: P2.2 R3.1 U1.1 | length 12.8
  Bottom Layer w0.3: R3.1 35.175,32.8 v2(36.75,31.225) 36.75,29.2 U1.1
NetP2_4: P2.4 R4.1 U1.44 | length 18.2
  Top Layer w0.2: v1(35.1,24.5) 35.928,24.5 37.75,26.321 37.75,32.966 37.43,33.286 34.975,33.286 34.975,34.653 P2.4
  Bottom Layer w0.2: U1.44@35.1,22.8 v1(35.1,24.5)
  Bottom Layer w0.3: R4.1 35.475,35.3 v2(35.8,35.625)
NetP3_1: P3.1 U1.32 | length 23.5
  Top Layer w0.2: P3.1 9.725,8.7 10.225,9.2 13.731,9.2 18.531,14 19.875,14 23.125,17.25 23.125,19.104 23.725,19.704 v1(23.725,20.325)
  Bottom Layer w0.2: v1(23.725,20.325) 25.425,20.325 U1.32
NetP3_2: P3.2 U1.15 | length 30.2
  Top Layer w0.2: P3.2 11.475,2.675 11.475,3.219 13.306,5.05 15.65,5.05 15.9,5.3 15.9,9.884 18.916,12.9 v1(32.4,12.9)
  Bottom Layer w0.2: v1(32.4,12.9) 32.7,12.6 U1.15
NetP3_3: P3.3 U1.14 | length 26.3
  Top Layer w0.2: P3.3 12.265,7.239 18.676,13.65 31.771,13.65 31.996,13.875 32.804,13.875 33.029,13.65 v1(33.45,13.65)
  Bottom Layer w0.2: v1(33.45,13.65) 33.45,11.55 U1.14
NetP3_5: P3.5 U1.13 | length 25
  Top Layer w0.2: P3.5 14.805,9.284 18.821,13.3 31.916,13.3 32.141,13.525 32.659,13.525 33.284,12.9 v1(34.3,12.9)
  Bottom Layer w0.2: U1.13 v1(34.3,12.9)
NetP4_1: P4.1 R13.2 | length 4.7
  Top Layer w0.2: v1(35.6,4.9) 35.6,5.7 36.82,6.92 P4.1
  Bottom Layer w0.2: v1(35.6,4.9) 36.7,4.9 36.9,5.1 R13.2
NetP4_4: P4.4 R10.2 | length 1.5
  Top Layer w0.3: P4.4 40.63,3.555 v1(41.15,4.075)
NetQ1_1: Q1.2 Q2.3 R23.1 | length 3.6
  Top Layer w0.2: Q2.3 29.6,25.6 R23.1 31.45,24 Q1.2
NetQ2_1: Q2.1 R27.1 R31.2 | length 5.6
  Top Layer w0.2: Q2.1 31.6,27.775 31.725,27.65 R31.2@33.2,27.65 ; R31.2@33.2,27.205 R31.2@33.2,27.65 ; R27.1 R31.2 ; R31.2@33.2,27.65 R31.2 ; R31.2@33.2,27.65 33.2,27.775 R31.2
NetR5_1: R5.1 U1.8 | length 11.9
  Top Layer w0.3: R5.1 33.5,7.4 34.311,7.4 v1(34.739,7.828)
  Bottom Layer w0.3: v1(34.739,7.828) 34.739,8.332 38.375,11.968 38.375,14.538 37.363,15.55 U1.8
NetR6_1: R6.1 U1.9 | length 11.2
  Bottom Layer w0.3: v1(32.1,7.5) 33.27,7.5 37.925,12.155 37.925,14.188 37.363,14.75 U1.9
NetR7_1: R7.1 U2.23 | length 6.2
  Bottom Layer w0.2: R7.1 8.56,20.825 9.225,20.16 9.225,17.825 9.8,17.25 U2.23
NetR8_1: R8.1 U2.22 | length 4.7
  Bottom Layer w0.2: R8.1 8.2,18.355 9.955,16.6 U2.22
NetR9_1: R9.1 U1.4 | length 13.9
  Bottom Layer w0.3: U1.4 37.914,18.75 38.489,19.325 40.611,19.325 42.775,17.161 R9.1
NetR9_2: R9.2 R10.1 R11.1 | length 3.7
  Bottom Layer w0.2: R10.1@40.95,6.75 R11.1 42.825,6.725 42.825,8.475 R9.2
NetR12_1: R12.1 U1.5 | length 13.9
  Bottom Layer w0.3: U1.5 37.751,17.95 38.676,18.875 40.424,18.875 42.325,16.974 42.325,12.25 40.925,10.85 R12.1
NetR12_2: R12.2 R13.1 R14.1 | length 6.1
  Bottom Layer w0.2: R13.1 39.05,6.7 R14.1 R14.1@39.154,6.725 ; R14.1@39.625,7.108 39.625,6.725 R14.1@39.154,6.725 ; R12.2@40.542,8.025 40.925,8.025 R12.2 40.904,8.475 R14.1@39.154,6.725
NetR19_1: R19.1 R21.2 U5.3 | length 4.7
  Top Layer w0.5: U5.3 16.605,26.155 v2(17.15,26.7)
  Bottom Layer w0.5: R19.1 R21.2
NetR20_2: R20.2 U5.2 | length 1.9
  Top Layer w0.5: U5.2 14.71,24.875 v2(16.575,24.875)
NetR22_2: R22.2 R24.1 R25.1 | length 3.6
  Top Layer w0.3: R25.1 44.475,14.95 R24.1 R22.2
NetR25_2: R25.2 R26.1 | length 1.7
  Top Layer w0.3: R26.1 40.875,15 R25.2
NetR27_2: R27.2
NetR28_1: R28.1 R29.2 R32.2 | length 3.5
  Top Layer w0.3: R29.2 44.45,13.025 R28.1 44.475,11.3 R32.2
NetR29_1: R29.1 R30.2 | length 1.7
  Top Layer w0.3: R30.2 40.9,13.05 R29.1
NetU1_2: U1.2 U3.5 | length 14
  Bottom Layer w0.3: U1.2 37.55,20.35 37.925,20.725 37.925,21.388 37.7,21.613 37.7,29.678 39.46,31.438 U3.5
NetU1_3: U1.3 U3.3 | length 20.1
  Bottom Layer w0.3: U1.3 37.951,19.55 38.375,19.974 38.375,21.575 38.15,21.8 38.15,29.491 40.61,31.951 40.61,35.975 U3.3
NetU1_10: U1.10 U2.1 | length 22.2
  Bottom Layer w0.2: U2.1 19.925,21.95 26.3,21.95 34.3,13.95 U1.10
NetU1_11: U1.11 U2.5 | length 29.4
  Top Layer w0.2: v1(16.45,16.975) 20.425,20.95 23.984,20.95 24.35,20.584 24.35,19.834 23.475,18.959 23.475,17.616 26.821,14.27 33.186,14.27 33.191,14.275 34.4,14.275 v1(35.575,13.1)
  Bottom Layer w0.2: v1(16.45,16.975) 17.375,17.9 U2.5
NetU1_23: U1.23
NetU1_24: U1.24
NetU1_25: U1.25
NetU1_26: U1.26
NetU1_43: U1.43
VCAP: Cap4.2 U1.7 | length 2.9
  Bottom Layer w0.3: U1.7 37.95,16.35 38.275,16.025 Cap4.2
pads on no net: C2.4 C2.Z1 C2.Z2 P1.6 U1.12 U1.19 U1.20 U1.27 U1.31 U1.33 U1.34 U1.35 U1.36 U1.37 U1.38 U1.41 U1.42 U2.2 U2.3 U2.6 U2.8 U2.9 U2.10 U2.11 U2.12 U2.13 U2.14 U2.19 U2.24 U2.27 U2.28 U3.4 U3.8 U3.9 U4.2 U5.1 U5.6 U6.2
copper on no net:
  other v4: -5.7,8.3

## Polygon pours and split planes (outlines as drawn)
GND on Bottom Layer "plan de masse" (solid, remove dead copper, pour order 19): 0,50 50,50 50,0 0,0

## Silkscreen, mask and mechanical layers (free items; w line width, h text height)
Top Overlay:
  rectangle: 15,13.5 25.45,15.525
  text "6V IN" at 7,43 h1.52
  text "6V" at 14,40.5 h0.9
  text "Mot" at 34.175,39.675 h1.52
  text "12V" at 5.5,39.5 h1.52 r270
  text "5V" at 32.75,36.6 h0.9
  text "12V" at 8.5,36.5 h1.1 r270
  text "3V" at 27.8,35.875 h0.9
  text "I2C" at 27.85,34.775 h1.52 r269.68
  text "12V" at 13.925,32.9 h0.9
  text "Capteur" at 35.15,21.825 h1.52 r270
  text "TX" at 5.9,20.2 h1.24
  text "RX" at 5.9,18.325 h1.24
  text "Carte Balise" at 9,18 h1.52
  text "2015" at 39.5,18 h0.9
  text "Sudriabotik" at 9,16 h1.52
  text "V1.0" at 9,14 h1.52
  text "Pick-it" at 20.45,9.85 h1.52
  text "BLE" at 10.55,9.75 h1.52
  text "Codeur" at 35.05,9.65 h1.52
Bottom Overlay:
  text "Designed by Quentin Mercier" at 1,43.5 h0.9 r270
Mechanical 1:
  lines w0.254: 3.246,3.5 3.754,3.5 ; 3.246,46.5 3.754,46.5 ; 3.5,3.246 3.5,3.754 ; 3.5,46.246 3.5,46.754
  lines w1.2: 0,50 0,50 ; 0,50 50,50 50,0 ; 0,50 0,0 50,0 ; 50,0 50,0
  text "3.50001,46.50001 (mm)" at 3.754,46.5 h1.52
  text "3.50001,3.50001 (mm)" at 3.754,3.5 h1.52
Mechanical 13:
  lines w0.254: 46.246,46.5 46.754,46.5 ; 46.5,46.246 46.5,46.754
  text "46.50001,46.50001 (mm)" at 46.754,46.5 h1.52
Mechanical 15:
  lines w1.2: 50,-20 50,50

## Dimensions
0,50 to 50,48.075 on Mechanical 15
0,50 to -5.575,0 on Mechanical 15

## Text inside footprints (layer, text, board x,y; h text height)
J4: Top Overlay "1" at 27.675,13.425 h1 r270; Top Overlay "4" at 32.425,21.675 h1 r270
P1: Top Overlay "1" at 19.691,8.404 h1 r180; Top Overlay "6" at 30.486,3.324 h1 r180
P2: Top Overlay "1" at 30.75,28.998 h1 r270; Top Overlay "4" at 35.5,37.248 h1 r270
P3: Top Overlay "1" at 7.82,8.354 h1 r180; Top Overlay "6" at 18.615,3.274 h1 r180
P4: Top Overlay "1" at 34.975,8 h1 r180; Top Overlay "4" at 43.225,3.25 h1 r180